# Altium PCB keyboard_pcb.PcbDoc
Units mil, origin at the board's own origin, x right, y up, seen from the top; angles counter-clockwise.
Board outline 5430 x 1600 mil, 2 copper layers (Top Layer, Bottom Layer); 5 components, 5 nets, 30 pads, 0 vias.
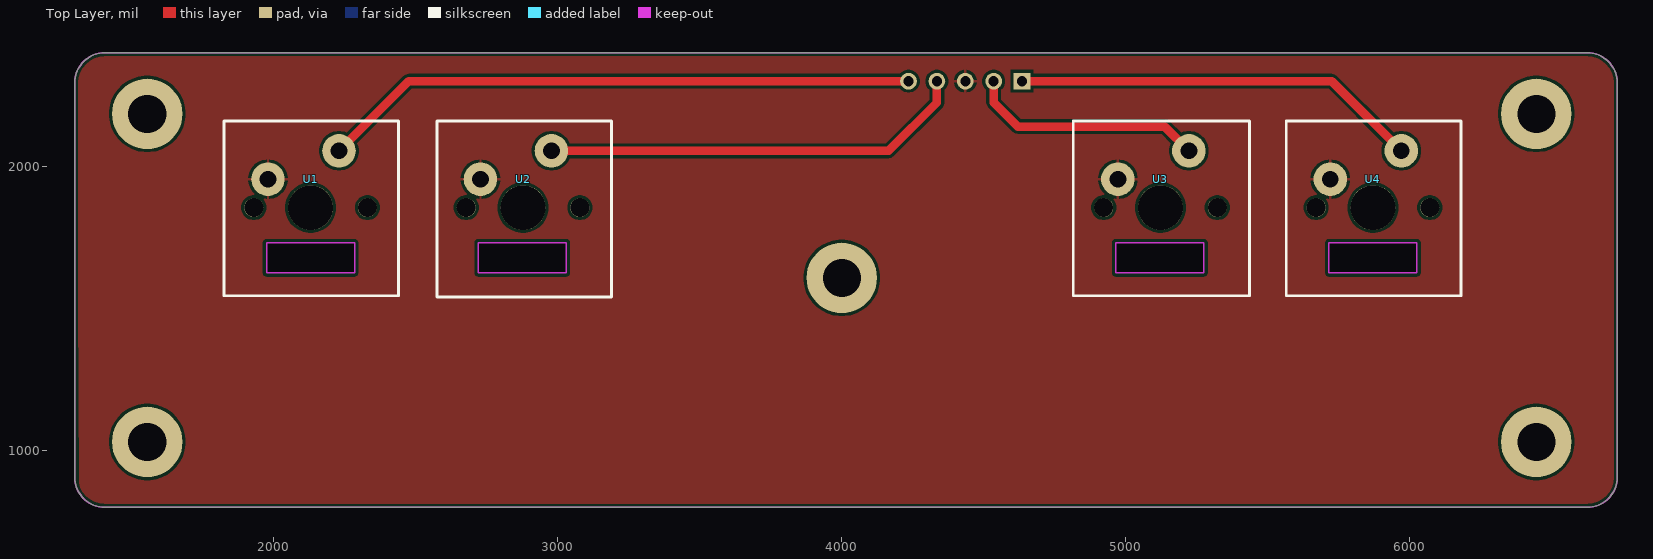
[diagram p0: Top Layer view]
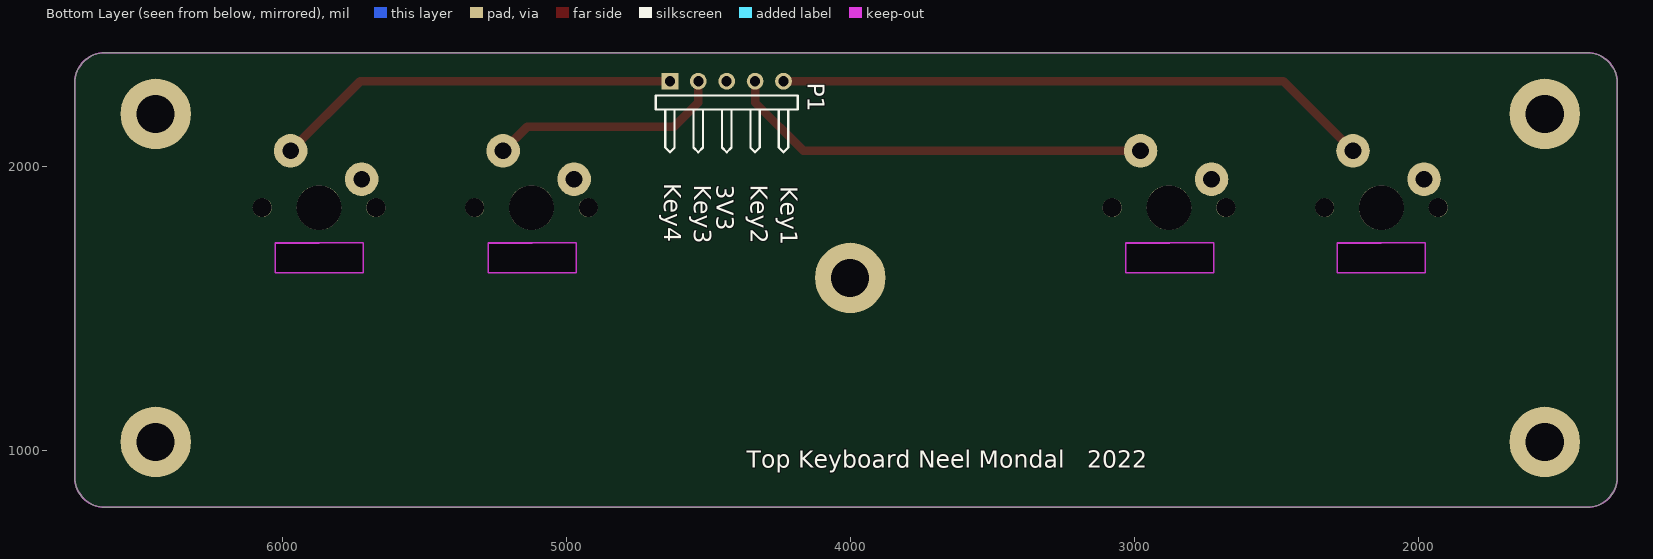
[diagram p1: Bottom Layer view, seen from below]
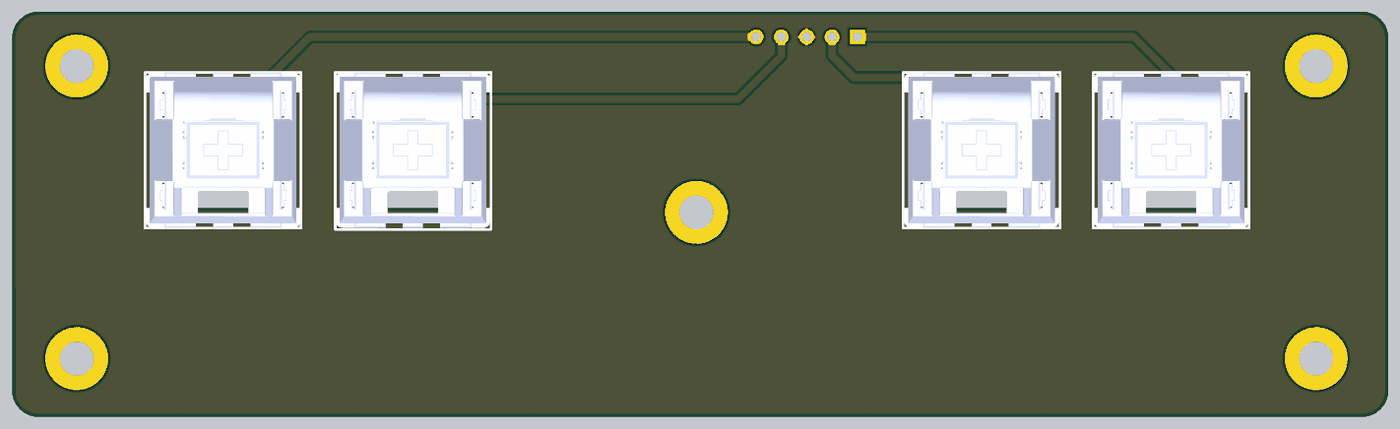
[diagram p2: 3D render of the assembled board from above, using the file's embedded part models]

## Layer stack, top to bottom
Top Solder: solder mask 0.4, Solder Resist, Dk 3.5
Top Layer: signal copper 1.4
Dielectric 1: dielectric 12.6, FR-4, Dk 4.8
Bottom Layer: signal copper 1.4
Bottom Solder: solder mask 0.4, Solder Resist, Dk 3.5

## Board outline
1300,905 ccw(c1405,905) 1405,800 6625,800 ccw(c6625,905) 6730,905 6730,2295 ccw(c6625,2295) 6625,2400 1405,2400 ccw(c1405,2295) 1300,2295
cut-out: 5715,1731.43 5715,1625 6025,1625 6025,1728.66
cut-out: 4965,1731.43 4965,1625 5275,1625 5275,1728.66
cut-out: 2720,1731.38 2720,1625 3030,1625 3030,1728.62
cut-out: 1975,1731.38 1975,1625 2285,1625 2285,1728.62

## Design rules (kind name [scope] priority, off if disabled: settings)
Clearance [All] p1: gap=10 ignorepadtopadclearanceinfootprint=FALSE except(0: Arc-Hole Track-Hole SMDPad-Hole THPad-Hole Via-Hole Fill-Hole Poly-Hole Region-Hole Text-Hole)
HoleSize [All] p1: absolutevalues=TRUE maxlimit=196.85 minlimit=1 maxpercent=80.000 minpercent=20.000
PolygonConnect [All] p1: connectstyle=Relief reliefconductorwidth=10 reliefentries=4 polygonreliefangle="90 Angle" airgapwidth=10
RoutingVias [All] p1: holewidth=28 width=50 viastyle="Through Hole" minholewidth=28 minwidth=50 maxholewidth=28 maxwidth=50
SolderMaskExpansion [All] p1: expansion=4 istentingtop=FALSE
Width [All] p1: maxlimit=30 minlimit=10 preferedwidth=10
29 further rules are at their usual default settings.

## Classes and differential pairs
component class keyboard_schem: P1 U2 U4

## Components (designator, comment, footprint, x,y, rotation, side; value= is the part's Value field where it differs from the comment)
P1 "Header 5H" HDR1X5H 4635,2300 r180 bottom locked
U1 "Cherry MX" "Cherry MX-Footprint-1" 2130,1855 r0 top locked
U2 "Cherry MX" "Cherry MX-Footprint-1" 2878.03,1855 r0 top locked
U3 "Cherry MX" "Cherry MX-Footprint-1" 5122.13,1855 r0 top locked
U4 "Cherry MX" "Cherry MX-Footprint-1" 5870.16,1855 r0 top locked

## Footprints (in the part's own frame and the unit in brackets; to place one, negate y for a bottom-side part, rotate by r counter-clockwise, add the part's x,y. Pads: shape width x height; smd on the part's side, far side on the other; paste and mask are expansions set on the pad)
"Cherry MX-Footprint-1" [mm]
  round 3 hole 1.5: 1(-3.81,2.54) 2(2.54,5.08)
  round 4 hole 4: 3(0,0)
  round 1.7 hole 1.7: 4(-5.08,0) 5(5.08,0)
  body extent -7.73,-7.85 7.87,7.75, height 15.44
HDR1X5H [mm] "Connector; Header; 5 Position; Right Angle"
  rect 1.5x1.5 hole 0.9: 1(0,0)
  round 1.5 hole 0.9: 2(2.54,0) 3(5.08,0) 4(7.62,0) 5(10.16,0)
  silkscreen extent -1.27,-6.35 11.43,-1.27

## Part data
P1: "Header, 5-Pin, Right Angle", LatestRevisionDate=17-Jul-2002, LatestRevisionNote="Re-released for DXP Platform.", Publisher="Altium Limited"
U1 U2 U3 U4: library part CMP-011-00015-1, "Footprint for PCB mounted Cherry MX switch"

## Free pads (board coordinates)
  round 248.03 hole 133.86: 8(1555,1030) 8(1555,2185) 8(4000.08,1607.5) 8(6445.16,1030) 8(6445.16,2185)

## Nets (pads, with @x,y where several pads share a name; then routed paths per layer and width w, separated by ;. In a path a pad name is that pad's centre, name@x,y a point inside that pad or via, vN(x,y) a via of type N, cw(c..) or ccw(c..) an arc to the next point about the centre after c; other vN are vias at no path point)
3V3: P1.3 U1.1 U2.1 U3.1 U4.1
Key1_RAW: P1.5 U1.2 | length 2106.5
  Top Layer w30: U1.2 2475,2300 P1.5
Key2_RAW: P1.4 U2.2 | length 1502.4
  Top Layer w30: U2.2 4165,2055 4335,2225 P1.4
Key3_RAW: P1.2 U3.2 | length 832.5
  Top Layer w30: P1.2 4535,2225 4620,2140 5137.13,2140 U3.2
Key4_RAW: P1.1 U4.2 | length 1436.6
  Top Layer w30: P1.1 5725.16,2300 U4.2
pads on no net: U1.3 U1.4 U1.5 U2.3 U2.4 U2.5 U3.3 U3.4 U3.5 U4.3 U4.4 U4.5

## Polygon pours and split planes (outlines as drawn)
3V3 on Top Layer "3V3_L01_P000" (solid, pour order 0): 1310,2390 1315,810 6725,810 6725,2395.08

## Keep-outs
Keep-Out Layer:
  lines w5: 1300,905 ccw(c1405,905) 1405,800 6625,800 ccw(c6625,905) 6730,905 6730,2295 ccw(c6625,2295) 6625,2400 1405,2400 ccw(c1405,2295) 1300,2295 1300,905 ; 1975,1625 2285,1625 2285,1731.38 1975,1731.38 1975,1625 ; 2720,1625 3030,1625 3030,1731.38 2720,1731.38 2720,1625 ; 4965,1625 5275,1625 5275,1731.43 4965,1731.43 4965,1625 ; 5715,1625 6025,1625 6025,1731.43 5715,1731.43 5715,1625

## Silkscreen, mask and mechanical layers (free items; w line width, h text height)
Top Overlay:
  lines w10: 1825,1545 2440,1545 2440,2160 1825,2160 1825,1545 ; 2575,1540 3190,1540 3190,2160 2575,2160 2575,1540 ; 4815,1545 5435,1545 5435,2160 4815,2160 4815,1545 ; 5565,1545 6180,1545 6180,2160 5565,2160 5565,1545
Bottom Overlay:
  text "Key4" at 4655.01,1940 h60 r90
  text "Key2" at 4350.01,1935 h60 r90
  text "3V3" at 4470,1935 h60 r90
  text "Key3" at 4550.01,1935 h60 r90
  text "Key1" at 4245.01,1930 h60 r90
  text "Top Keyboard Neel Mondal   2022" at 4365,940 h60
Mechanical 1:
  lines w5: 1300,905 ccw(c1405,905) 1405,800 6625,800 ccw(c6625,905) 6730,905 6730,2295 ccw(c6625,2295) 6625,2400 1405,2400 ccw(c1405,2295) 1300,2295 1300,905 ; 1975,1625 2285,1625 2285,1731.38 1975,1731.38 1975,1625 ; 2720,1625 3030,1625 3030,1731.38 2720,1731.38 2720,1625 ; 4965,1625 5275,1625 5275,1731.43 4965,1731.43 4965,1625 ; 5715,1625 6025,1625 6025,1731.43 5715,1731.43 5715,1625